# EAGLE board CT_schematic (EAGLE 7.6.0)

Size 100 x 80 mm. Coordinates in mm from the lower left corner, seen from the top.
Outline: 0,0 100,0 100,80 0,80 0,0
Copper layers (1*16): Top 0.035mm / dielectric 1.5mm / Bottom 0.035mm
Design rules "default": minimum track width 10mil, minimum drill 24mil, track to track 8mil, track to pad 8mil, pad to pad 8mil, via to via 8mil, smd to smd 8mil, copper to edge 40mil, drill to drill 8mil, minimum pad ring 10mil, minimum via ring 8mil, stop-mask expansion 4mil, vias tented up to drill 0mil, thermal gap 10mil

## Footprints (pad centres in the part's own frame; a part is rotated, then mirrored left to right if it is on the bottom)
C0603 = smd 0.8 x 0.8: 1 -0.762,0; 2 0.762,0
C0402 = smd 0.5 x 0.5: 1 -0.508,0; 2 0.508,0
C0805 = smd 1.2 x 1.3: 1 -1.016,0; 2 1.016,0
EXV-9H = smd 3.505 x 1.676: 1 -2.857,0; 2 2.857,0
L0603 = smd 0.8 x 0.8: 1 -0.762,0; 2 0.762,0
DR1040 = smd 1.6 x 3.2: 1 -4.458,0; 2 4.458,0
PJ-037B_PACKAGE = drill 3.7 square: 1 12,0 | drill 3.2 square: 2 6,0
R0603 = smd 0.8 x 0.8: 1 -0.762,0; 2 0.762,0
TFBGA64 = smd 0.35 x 0.35: A1 -1.75,1.75; A2 -1.25,1.75; A3 -0.75,1.75; A4 -0.25,1.75; A5 0.25,1.75; A6 0.75,1.75; A7 1.25,1.75; A8 1.75,1.75; B1 -1.75,1.25; B2 -1.25,1.25; B3 -0.75,1.25; B4 -0.25,1.25; B5 0.25,1.25; B6 0.75,1.25; B7 1.25,1.25; B8 1.75,1.25; C1 -1.75,0.75; C2 -1.25,0.75; C3 -0.75,0.75; C4 -0.25,0.75; C5 0.25,0.75; C6 0.75,0.75; C7 1.25,0.75; C8 1.75,0.75; D1 -1.75,0.25; D2 -1.25,0.25; D3 -0.75,0.25; D4 -0.25,0.25; D5 0.25,0.25; D6 0.75,0.25; D7 1.25,0.25; D8 1.75,0.25; E1 -1.75,-0.25; E2 -1.25,-0.25; E3 -0.75,-0.25; E4 -0.25,-0.25; E5 0.25,-0.25; E6 0.75,-0.25; E7 1.25,-0.25; E8 1.75,-0.25; F1 -1.75,-0.75; F2 -1.25,-0.75; F3 -0.75,-0.75; F4 -0.25,-0.75; F5 0.25,-0.75; F6 0.75,-0.75; F7 1.25,-0.75; F8 1.75,-0.75; G1 -1.75,-1.25; G2 -1.25,-1.25; G3 -0.75,-1.25; G4 -0.25,-1.25; G5 0.25,-1.25; G6 0.75,-1.25; G7 1.25,-1.25; G8 1.75,-1.25; H1 -1.75,-1.75; H2 -1.25,-1.75; H3 -0.75,-1.75; H4 -0.25,-1.75; H5 0.25,-1.75; H6 0.75,-1.75; H7 1.25,-1.75; H8 1.75,-1.75
SOIC-8 = smd 1.6 x 0.6: 1 -2.7,1.905 | smd 1.55 x 0.6: 2 -2.7,0.635; 3 -2.7,-0.635; 4 -2.7,-1.905; 5 2.7,-1.905; 6 2.7,-0.635; 7 2.7,0.635; 8 2.7,1.905
QFN-16 = smd 0.813 x 0.305: 1 -1.448,0.75; 2 -1.448,0.25; 3 -1.448,-0.25; 4 -1.448,-0.75; 9 1.448,-0.75; 10 1.448,-0.25; 11 1.448,0.25; 12 1.448,0.75 | smd 0.305 x 0.813: 5 -0.75,-1.448; 6 -0.25,-1.448; 7 0.25,-1.448; 8 0.75,-1.448; 13 0.75,1.448; 14 0.25,1.448; 15 -0.25,1.448; 16 -0.75,1.448 | smd 1.803 x 1.803: 17 0,0
MICRO_USB_AB = smd 0.4 x 1.35: 1 1.3,0.26; 2 0.65,0.26; 3 0,0.26; 4 -0.65,0.26; 5 -1.3,0.26 | drill 0.6 pad 0.95 long: 6 4.175,-2.54; 7 -4.175,-2.54 | drill 0.7 pad 1.1 long: 8 -2.225,0.46; 9 2.225,0.46
SOT143B = smd 1 x 0.7: 1 -0.75,-1 | smd 0.6 x 0.7: 2 0.95,-1; 3 0.95,1; 4 -0.95,1
ABS07-32.768KHZ-7-T = smd 1.1 x 2.4: 1 -2.5,0; 2 0,0
ASFL1 = smd 1.7 x 1.5: 1 -1.27,-1.1; 2 1.27,-1.1; 3 1.27,1.1; 4 -1.27,1.1
TSOT-23-5 = smd 1.3 x 0.62: 1 -1.31,0.95; 2 -1.31,0; 3 -1.31,-0.95; 4 1.31,-0.95; 5 1.31,0.95
SON-6 = smd 0.55 x 0.3: 1 -0.355,0.5 | smd 0.52 x 0.3: 2 -0.37,0; 3 -0.37,-0.5; 4 0.37,-0.5; 5 0.37,0; 6 0.37,0.5
SW_4-1437565-2 = smd 1.4 x 2.1: 1 -2.23,4.55; 2 -2.23,-4.55; 3 2.23,4.55; 4 2.23,-4.55
LGM67K-G1J2-24-Z = smd 0.8 x 1.4: A -2,0; C 0,0
NC7SZ125M5X = smd 1.3 x 0.7: 1 -1.3,0.95; 2 -1.3,0; 3 -1.3,-0.95; 4 1.3,-0.95; 5 1.3,0.95
DUMMY_PACKAGE_111 = drill 0.3: 1 0,-1; 2 1.5,-1; 3 3,-1

## Placement (x,y rotation side)
C1  1e-07  [C0603]  -38.1,50.8 0 top  (outside the outline)
C2  1e-07  [C0603]  -41.91,50.8 0 top  (outside the outline)
C3  1e-07  [C0603]  -45.72,50.8 0 top  (outside the outline)
C4  1e-07  [C0603]  -49.53,50.8 0 top  (outside the outline)
C5  4.7e-06  [C0603]  -34.29,50.8 0 top  (outside the outline)
C6  1e-07  [C0603]  -53.34,50.8 0 top  (outside the outline)
C7  1e-08  [C0603]  -57.15,50.8 0 top  (outside the outline)
C8  1e-06  [C0603]  -60.96,50.8 0 top  (outside the outline)
C9  1e-11  [C0402]  -45.72,55.88 0 top  (outside the outline)
C10  1e-11  [C0402]  -49.53,55.88 0 top  (outside the outline)
C11  1e-08  [C0402]  -53.34,55.88 0 top  (outside the outline)
C12  4.7e-06  [C0805]  -54.61,38.1 0 top  (outside the outline)
C13  1e-07  [C0402]  -57.15,55.88 0 top  (outside the outline)
C14  1e-07  [C0402]  -60.96,55.88 0 top  (outside the outline)
C15  1e-08  [C0402]  -15.24,60.96 0 top  (outside the outline)
C16  1e-05  [C0805]  -59.69,38.1 0 top  (outside the outline)
C17  1e-05  [C0805]  -15.24,45.72 0 top  (outside the outline)
C18  1e-07  [C0402]  -19.05,60.96 0 top  (outside the outline)
C19  0.0001  [EXV-9H]  -35.56,30.48 0 top  (outside the outline)
C20  0.0001  [EXV-9H]  -46.99,30.48 0 top  (outside the outline)
C21  1e-08  [C0402]  -22.86,60.96 0 top  (outside the outline)
F1  240.0  [L0603]  -15.24,55.88 0 top  (outside the outline)
I1  8.2e-06  [DR1040]  -19.05,20.32 0 top  (outside the outline)
J1  PJ-037B  [PJ-037B_PACKAGE]  -27.94,7.62 0 top  (outside the outline)
R2  1000.0  [R0603]  -19.05,55.88 0 top  (outside the outline)
R4  4700.0  [R0603]  -22.86,55.88 0 top  (outside the outline)
R5  2200.0  [R0603]  -26.67,55.88 0 top  (outside the outline)
R6  2200.0  [R0603]  -30.48,55.88 0 top  (outside the outline)
R7  10000.0  [R0603]  -48.26,45.72 0 top  (outside the outline)
R8  10000.0  [R0603]  -53.34,45.72 0 top  (outside the outline)
R9  10000.0  [R0603]  -58.42,45.72 0 top  (outside the outline)
R10  10000.0  [R0603]  -15.24,50.8 0 top  (outside the outline)
R11  10000.0  [R0603]  -20.32,50.8 0 top  (outside the outline)
R12  220000.0  [R0603]  -33.02,45.72 0 top  (outside the outline)
R13  1000000.0  [R0603]  -27.94,45.72 0 top  (outside the outline)
R14  10000.0  [R0603]  -25.4,50.8 0 top  (outside the outline)
R15  10000.0  [R0603]  -30.48,50.8 0 top  (outside the outline)
R16  9100.0  [R0603]  -34.29,55.88 0 top  (outside the outline)
R17  680000.0  [R0603]  -38.1,45.72 0 top  (outside the outline)
R18  120000.0  [R0603]  -43.18,45.72 0 top  (outside the outline)
U1  STM32L151R8H6A  [TFBGA64]  -38.1,19.05 0 top  (outside the outline)
U2  AT25M02-SSHD-T  [SOIC-8]  -53.34,19.05 0 top  (outside the outline)
U3  MMA8451QT  [QFN-16]  -39.37,55.88 0 top  (outside the outline)
U4  47590-0001  [MICRO_USB_AB]  -36.83,7.62 0 top  (outside the outline)
U5  prtr5v0u2ax  [SOT143B]  -35.56,60.96 0 top  (outside the outline)
U6  ABS07-32.768KHZ-7-T  [ABS07-32.768KHZ-7-T]  -27.94,39.37 0 top  (outside the outline)
U7  ASFL1-25MHZ-NCS  [ASFL1]  -26.67,30.48 0 top  (outside the outline)
U8  ltc3406es5  [TSOT-23-5]  -20.32,44.45 0 top  (outside the outline)
U9  TPS3895ADRYR  [SON-6]  -44.45,59.69 0 top  (outside the outline)
U10  4-1437565-2  [SW_4-1437565-2]  -57.15,6.35 0 top  (outside the outline)
U11  Q65110A2395  [LGM67K-G1J2-24-Z]  -36.83,38.1 0 top  (outside the outline)
U12  nc7sz125m5x  [NC7SZ125M5X]  -48.26,36.83 0 top  (outside the outline)
U13  Dummy  [DUMMY_PACKAGE_111]  -41.91,60.96 0 top  (outside the outline)

## Library data of the parts
C1-C21 F1 I1 J1 R2 R4-R18 U1-U13 = circuit_tree

## Nets
CLK_CRYSTAL_U1_A1: C9.1 U1.A1 U6.1
CLK_CRYSTAL_U1_B1: C10.1 U1.B1 U6.2
CLK_U1_C1: U1.C1 U7.3
GND: C1.2 C2.2 C3.2 C4.2 C5.2 C6.2 C7.2 C8.2 C9.2 C10.2 C11.2 C12.2 C13.2 C14.2 C15.2 C16.2 C17.1 C17.2 C18.2 C19.2 C20.2 C21.2 J1.2 R2.2 R7.2 R11.2 R12.2 R16.2 R18.2 U1.C2 U1.D4 U1.D5 U1.D6 U1.F1 U2.4 U3.5 U3.10 U3.12 U3.17 U4.5 U4.6 U4.7 U4.8 U4.9 U5.1 U7.2 U8.2 U9.2 U11.C U12.1 U12.3 U13.1
NET_U1_A3: R6.1 U1.A3 U3.6
NET_U1_B2: C6.1 U1.B2
NET_U1_B3: R5.1 U1.B3 U3.4
NET_U1_B4: R7.1 U1.B4
NET_U1_E1: R4.1 U1.E1 U12.4
NET_U1_H1: C7.1 C8.1 F1.1 U1.G1 U1.H1
NET_U1_H7: U11.A
NET_U1_H8: U10.3 U10.4
NET_U2_3: R8.1 U2.3
NET_U2_7: R10.1 U2.7
NET_U3_2: C14.1 U3.2
NET_U3_7: R11.1 U3.7
NET_U5_4: U4.1 U5.4
NET_U8_1: U8.1
NET_U8_3: I1.1 U8.3
NET_U8_5: R12.1 R13.1 U8.5
NET_U8_ATNET_3: I1.2 R13.2
NET_U9_1: R15.1 R16.1 U9.1
NET_U9_3: R17.2 R18.1 U9.3
NET_U9_4: R14.1 U9.4 U12.2
NET_U10_1: R2.1 U10.1 U10.2
PROC_SPI1_MISO: U1.A4 U2.2
PROC_SPI1_MOSI: U1.C4 U2.5
PROC_SPI1_NSS: R9.1 U1.A6 U2.1
PROC_SPI1_SCK: U1.A5 U2.6
PROC_TIM2_CH3: U1.F3 U13.2
PROC_TIM2_CH4: U1.G3 U13.3
PROC_USB_DM: U1.C8 U4.2 U5.3
PROC_USB_DP: U1.B8 U4.3 U5.2
VCC_S1_4V8: C16.1 C19.1 C20.1 J1.1 U8.4
VCC_TIER1_3V3: C1.1 C2.1 C3.1 C4.1 C5.1 C11.1 C12.1 C13.1 C15.1 C17.2 C18.1 C21.1 F1.2 I1.2 R4.2 R5.2 R6.2 R8.2 R9.2 R10.2 R13.2 R14.2 R15.2 R17.1 U1.D2 U1.E4 U1.E5 U1.E6 U2.8 U3.1 U3.14 U7.4 U9.6 U12.5

## Tracks (layer width: path | path; a pad name or v marks a point on that pad's centre or on a via)
CLK_CRYSTAL_U1_A1  (2 unrouted)
CLK_CRYSTAL_U1_B1  (2 unrouted)
CLK_U1_C1  (1 unrouted)
GND  (51 unrouted)
NET_U1_A3  (2 unrouted)
NET_U1_B2  (1 unrouted)
NET_U1_B3  (2 unrouted)
NET_U1_B4  (1 unrouted)
NET_U1_E1  (2 unrouted)
NET_U1_H1  (4 unrouted)
NET_U1_H8  (1 unrouted)
NET_U2_3  (1 unrouted)
NET_U2_7  (1 unrouted)
NET_U3_2  (1 unrouted)
NET_U3_7  (1 unrouted)
NET_U5_4  (1 unrouted)
NET_U8_3  (1 unrouted)
NET_U8_5  (2 unrouted)
NET_U8_ATNET_3  (1 unrouted)
NET_U9_1  (2 unrouted)
NET_U9_3  (2 unrouted)
NET_U9_4  (2 unrouted)
NET_U10_1  (2 unrouted)
PROC_SPI1_MISO  (1 unrouted)
PROC_SPI1_MOSI  (1 unrouted)
PROC_SPI1_NSS  (2 unrouted)
PROC_SPI1_SCK  (1 unrouted)
PROC_TIM2_CH3  (1 unrouted)
PROC_TIM2_CH4  (1 unrouted)
PROC_USB_DM  (2 unrouted)
PROC_USB_DP  (2 unrouted)
VCC_S1_4V8  (4 unrouted)
VCC_TIER1_3V3  (33 unrouted)